# Altium PCB PCB_Business_Card.PcbDoc
Units mm, origin at the board's own origin, x right, y up, seen from the top; angles counter-clockwise.
Board outline 85.72 x 53.91 mm, 2 copper layers (Top Layer, Bottom Layer), stack 1.671 mm thick; 39 components, 49 nets, 185 pads, 16 vias.
Unrouted connection lines stored in the file: 1.
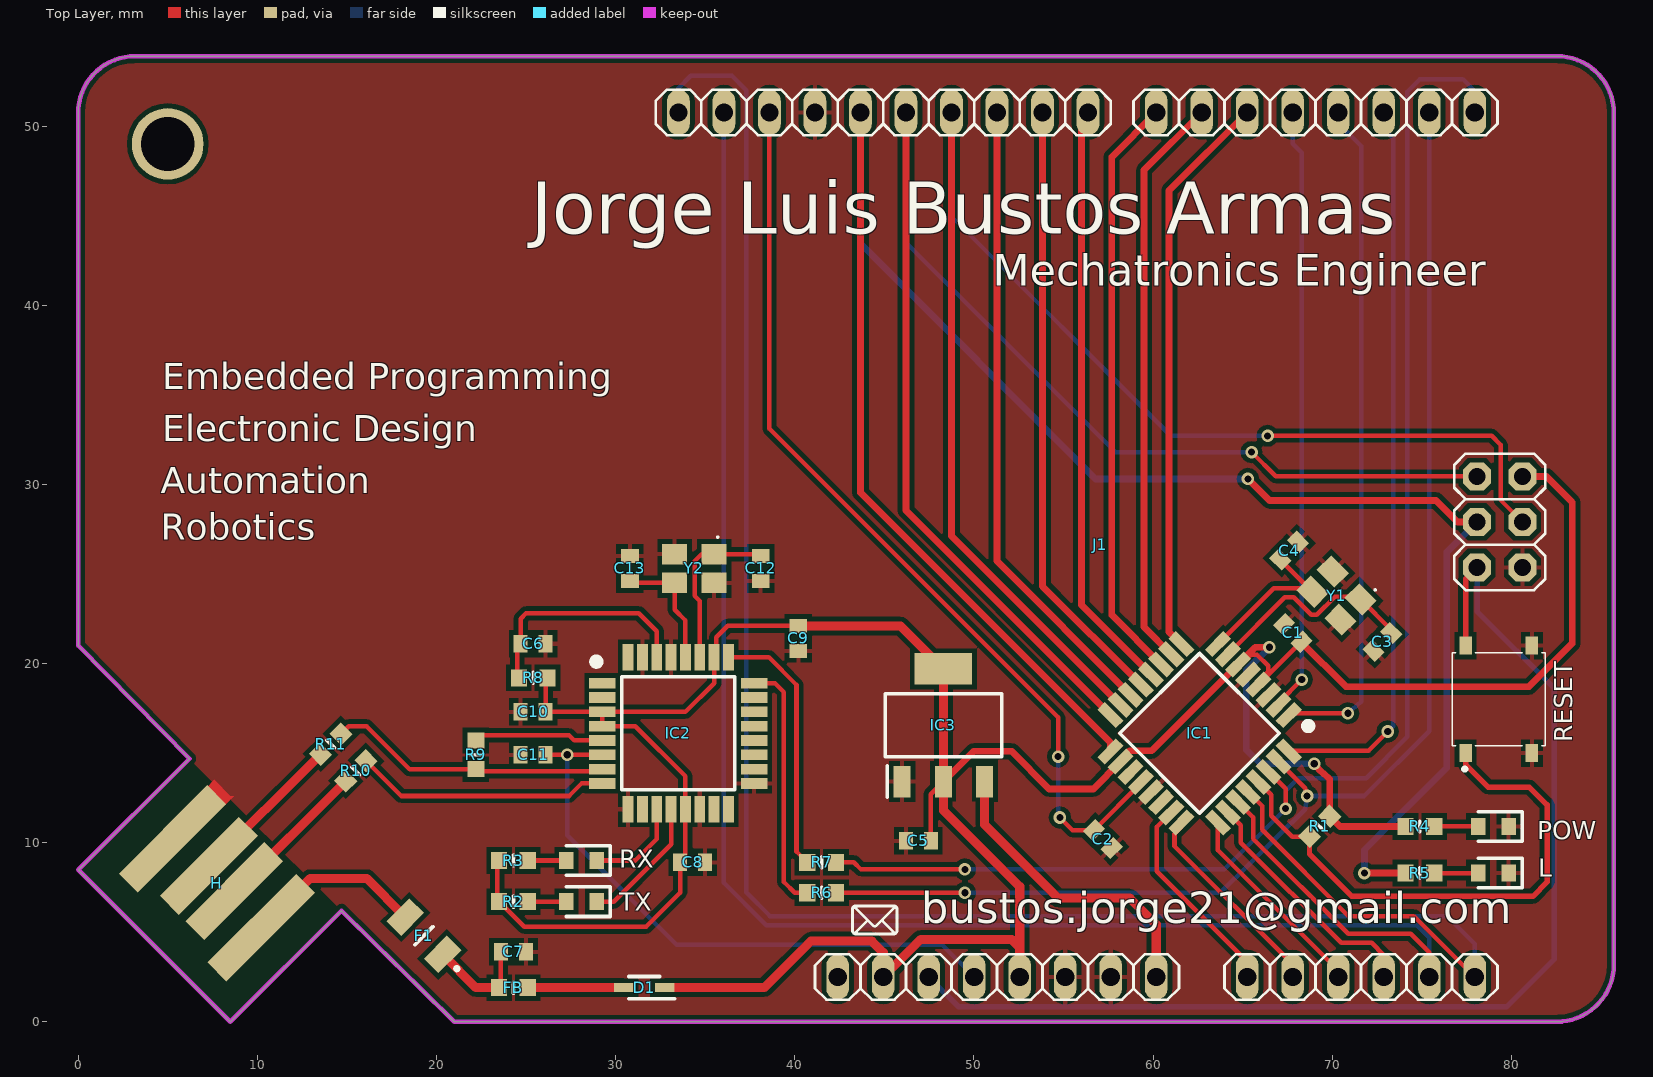
[diagram p0: Top Layer view]
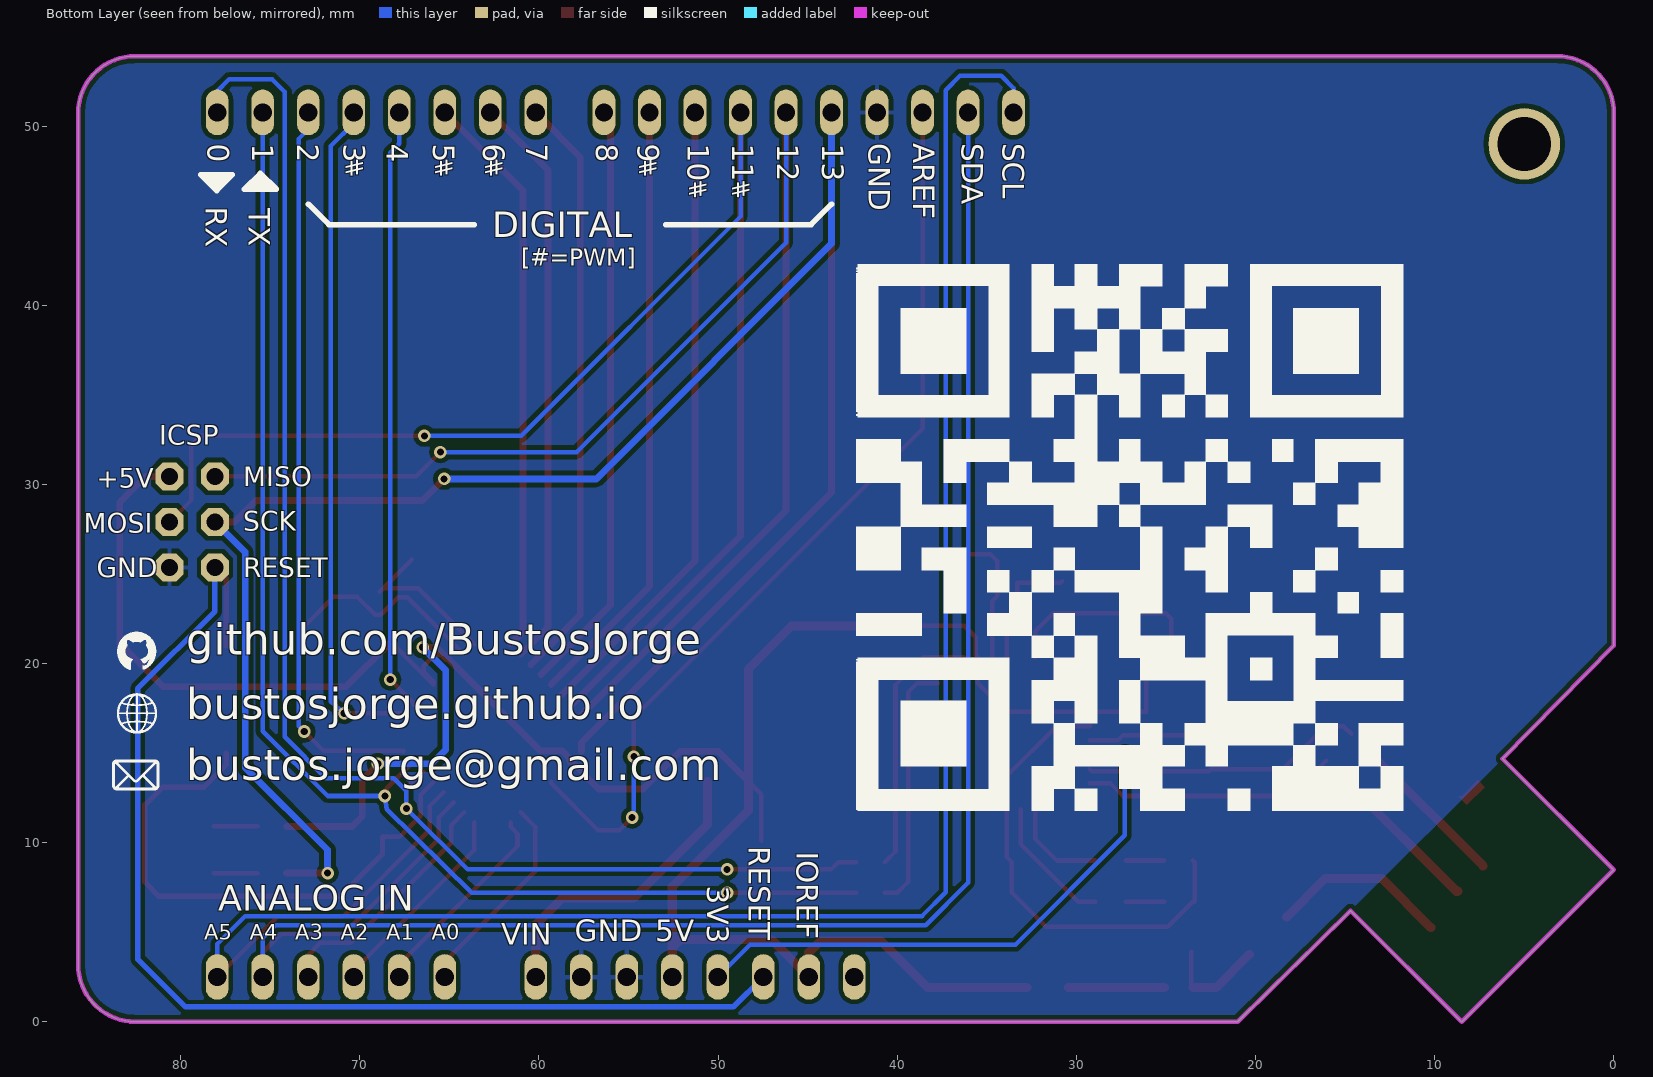
[diagram p1: Bottom Layer view, seen from below]
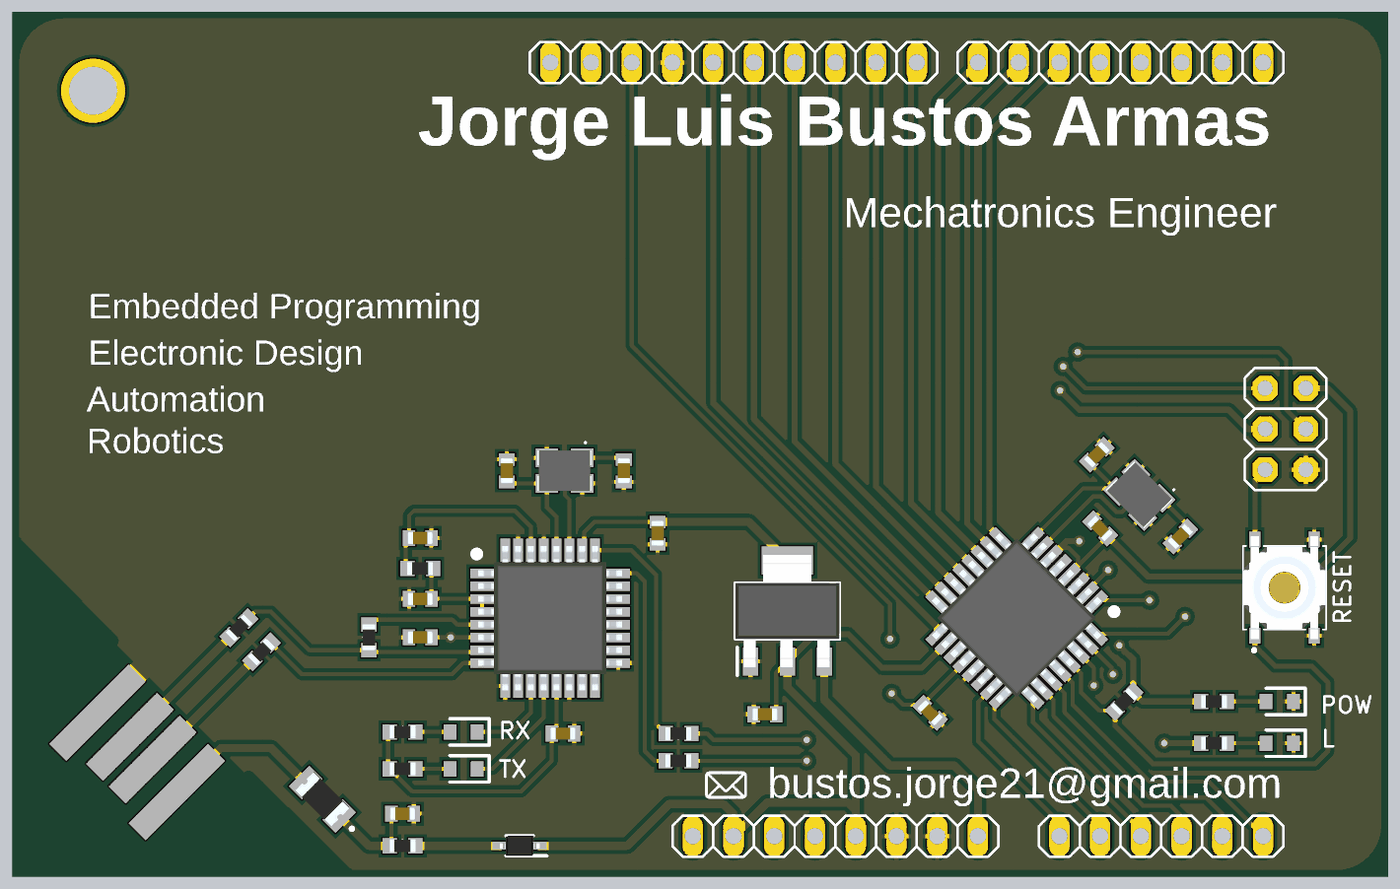
[diagram p2: 3D render of the assembled board from above, using the file's embedded part models]

## Layer stack, top to bottom
Top Solder: solder mask 0.0102, Solder Resist, Dk 3.5
Top Layer: signal copper 0.0356
Dielectric 1: dielectric 1.6, FR-4, Dk 4.8
Bottom Layer: signal copper 0.0356
Bottom Solder: solder mask 0.0102, Solder Resist, Dk 3.5

## Board outline
6.215,14.685 0,21 0,50.72 cw(c3.18,50.72) 3.18,53.9 82.545,53.9 cw(c82.545,50.72) 85.725,50.72 85.725,3.18 85.72,3.18 cw(c82.54,3.18) 82.54,0 21,0 14.7,6.2 8.493,-0.008 8.485,0 0,8.485 0.008,8.478

## Design rules (kind name [scope] priority, off if disabled: settings)
Clearance [All] p1: gap=0.254 except(0.2: SMDPad-SMDPad)
ComponentClearance [All] p1 off: gap=0.254 collisioncheckmode=3 verticalgap=0.254 showdistances=FALSE
PolygonConnect [All] p1: connectstyle=Relief reliefconductorwidth=0.254 reliefentries=4 polygonreliefangle="90 Angle" airgapwidth=0.254
RoutingVias [All] p1: holewidth=0.711 width=1.27 viastyle="Through Hole" minholewidth=0.711 minwidth=1.27 maxholewidth=0.711 maxwidth=1.27
SolderMaskExpansion [All] p1: expansion=0.102
Width [All] p1: maxlimit=0.508 minlimit=0.254 preferedwidth=0.381
29 further rules are at their usual default settings.

## Components (designator, comment, footprint, x,y, rotation, side; value= is the part's Value field where it differs from the comment)
C1 "1uF" CAPC1608X90N 67.8,21.7 r135 top
C2 "100nF" CAPC1608X90N 57.2,10.2 r315 top
C3 "22pF" CAPC1608X90N 72.8,21.2 r225 top
C4 "22pF" CAPC1608X90N 67.6,26.3 r225 top
C5 "1uF" CAPC1608X90N 46.9,10.1 r0 top
C6 "0.1uF" CAPC1608X90N 25.4,21.1 r180 top
C7 "10nF" CAPC1608X90N 24.3,3.9 r0 top
C8 "0.1uF" CAPC1608X90N 34.3,8.9 r180 top
C9 "0.1uF" CAPC1608X90N 40.2,21.4 r90 top
C10 "10uF" CAPC1608X90N 25.4,17.3 r0 top
C11 "33nF" CAPC1608X90N 25.4,14.9 r0 top
C12 "22pF" CAPC1608X90N 38.1,25.3 r270 top
C13 "22pF" CAPC1608X90N 30.8,25.3 r270 top
D1 "1PS76SB10,115" SOD2512X110N 31.6,1.9 r180 top
F1 "1206L200" 1206L05015YR 19.3,4.8 r135 top
FB "Ferrite Beat" RESC1608X55N 24.3,1.9 r180 top
H "USB" USB_FLAT 4.277,4.263 r45 top locked
IC1 "ATMEGA328PB-AN" QFP80P900X900X120-32N 62.6,16.1 r225 top
IC2 "FT232BL" QFP80P900X900X160-32N 33.5,16.1 r0 top
IC3 "LM1117MPX-5.0" SOT230P700X180-4N 48.3,16.55 r90 top
J1 "HEADER" "CONECTOR ARDUINO UNO" 77.96,50.76 r0 top locked
L "SM0603GCL" LEDC1608X60N 79,8.3 r180 top
POW "SM0603GCL" LEDC1608X60N 79,10.9 r180 top
R1 "10K" RESC1608X55N 69.3,10.9 r45 top
R2 "10K" RESC1608X55N 24.3,6.7 r180 top
R3 "10K" RESC1608X55N 24.3,9 r180 top
R4 "10K" RESC1608X55N 74.9,10.9 r180 top
R5 "10K" RESC1608X55N 74.9,8.3 r180 top
R6 "1K" RESC1608X55N 41.5,7.2 r180 top
R7 "1K" RESC1608X55N 41.5,8.9 r180 top
R8 "470R" RESC1608X55N 25.4,19.2 r0 top
R9 "1K5" RESC1608X55N 22.2,14.9 r90 top
R10 "27R" RESC1608X55N 15.5,14 r225 top
R11 "27R" RESC1608X55N 14.1,15.5 r225 top
RESET "PTS526_SK15_SMTR2_LFS" PTS526SK15SMTR2LFS 79.3,18 r90 top
RX "SM0603GCL" LEDC1608X60N 28.1,9 r180 top
TX "SM0603GCL" LEDC1608X60N 28.1,6.7 r180 top
Y1 "TSX-3225_16.0000MF18X-AC0" TSX3225160000MF18XAC0 70.244,23.788 r135 top
Y2 "TSX-3225_16.0000MF18X-AC0" TSX3225160000MF18XAC0 34.4,25.3 r180 top

## Footprints (in the part's own frame and the unit in brackets; to place one, negate y for a bottom-side part, rotate by r counter-clockwise, add the part's x,y. Pads: shape width x height; smd on the part's side, far side on the other; paste and mask are expansions set on the pad)
1206L05015YR [mm]
  rect 1.16x1.82 smd: 1(-1.475,0) 2(1.475,0)
  silkscreen extent -2.7,-0.73 0,0.73, body extent -1.6,-0.83 1.6,0.83, height 1.6
CAPC1608X90N [mm]
  rect 0.78x0.99 smd: 1(-0.7,0) 2(0.7,0)
  body extent -0.8,-0.41 0.8,0.41, height 0.9
"CONECTOR ARDUINO UNO" [mil]
  oval 50x100 hole 40: 1(-300,0) 2(-400,0) 3(-900,-1900) 4(-1300,-1900) 4(-1000,-1900) 5(-800,-1900) 6(-1100,-1900) 9(-500,0) 10(-600,0) 11(-700,0) 12(-850,0) 13(-950,0) 14(-1050,0) 15(-1150,0) 16(-1250,0) 17(-1350,0) 20(-1550,0) 21(-1450,0) 23(-500,-1900) 24(-400,-1900) 25(-300,-1900) 26(-200,-1900) 27(-1650,0) 27(-100,-1900) 28(-1750,0) 28(0,-1900) 29(-1200,-1900) 30(0,0) 31(-100,0) 32(-200,0) 33(-700,-1900) ""(-1400,-1900)
  oct 61.02x61.02 hole 37.4: 4(105,-800) 5(105,-1000) 15(105,-900) 16(5,-800) 17(5,-900) 29(5,-1000)
  silkscreen extent -1800,-1950 155,50
LEDC1608X60N [mm]
  rect 0.8x0.95 smd: 1(-0.85,0) 2(0.85,0)
  silkscreen extent -1.6,-0.82 0.85,0.82
PTS526SK15SMTR2LFS [mm]
  rect 1x0.7 smd: 1(-3,1.85) 2(3,1.85) 3(-3,-1.85) 4(3,-1.85)
  silkscreen extent -4,-2.6 2.6,2.6, body extent -3.2,-2.6 3.2,2.6, height 1.55
QFP80P900X900X120-32N [mm]
  rect 1.475x0.6 smd: 1(-4.238,2.8) 2(-4.238,2) 3(-4.238,1.2) 4(-4.238,0.4) 5(-4.238,-0.4) 6(-4.238,-1.2) 7(-4.238,-2) 8(-4.238,-2.8) 17(4.238,-2.8) 18(4.238,-2) 19(4.238,-1.2) 20(4.238,-0.4) 21(4.238,0.4) 22(4.238,1.2) 23(4.238,2) 24(4.238,2.8)
  rect 0.6x1.475 smd: 9(-2.8,-4.238) 10(-2,-4.238) 11(-1.2,-4.238) 12(-0.4,-4.238) 13(0.4,-4.238) 14(1.2,-4.238) 15(2,-4.238) 16(2.8,-4.238) 25(2.8,4.238) 26(2,4.238) 27(1.2,4.238) 28(0.4,4.238) 29(-0.4,4.238) 30(-1.2,4.238) 31(-2,4.238) 32(-2.8,4.238)
  silkscreen extent -4.77,-3.15 3.15,4.2, body extent -4.5,-4.5 4.5,4.5, height 1.2
QFP80P900X900X160-32N [mm]
  rect 1.475x0.6 smd: 1(-4.238,2.8) 2(-4.238,2) 3(-4.238,1.2) 4(-4.238,0.4) 5(-4.238,-0.4) 6(-4.238,-1.2) 7(-4.238,-2) 8(-4.238,-2.8) 17(4.238,-2.8) 18(4.238,-2) 19(4.238,-1.2) 20(4.238,-0.4) 21(4.238,0.4) 22(4.238,1.2) 23(4.238,2) 24(4.238,2.8)
  rect 0.6x1.475 smd: 9(-2.8,-4.238) 10(-2,-4.238) 11(-1.2,-4.238) 12(-0.4,-4.238) 13(0.4,-4.238) 14(1.2,-4.238) 15(2,-4.238) 16(2.8,-4.238) 25(2.8,4.238) 26(2,4.238) 27(1.2,4.238) 28(0.4,4.238) 29(-0.4,4.238) 30(-1.2,4.238) 31(-2,4.238) 32(-2.8,4.238)
  silkscreen extent -4.77,-3.15 3.15,4.2, body extent -4.5,-4.5 4.5,4.5, height 1.6
RESC1608X55N [mm]
  rect 0.9x0.95 smd: 1(-0.8,0) 2(0.8,0)
  silkscreen extent 0,-0.3 0,0.3, body extent -0.8,-0.4 0.8,0.4, height 0.55
SOD2512X110N [mm]
  rect 1.1x0.5 smd: 1(-1.15,0) 2(1.15,0)
  silkscreen extent -1.7,-0.63 0.85,0.63, body extent -1.24,-0.62 1.24,0.63, height 0.93
SOT230P700X180-4N [mm]
  rect 1.75x0.95 smd: 1(-3.15,2.3) 2(-3.15,0) 3(-3.15,-2.3)
  rect 1.75x3.2 smd: 4(3.15,0)
  silkscreen extent -4.03,-3.25 1.75,3.25, body extent -3.5,-3.25 3.5,3.25, height 1.68
TSX3225160000MF18XAC0 [mm]
  rect 1.4x1.15 smd: 1(-1.1,-0.8) 2(1.1,-0.8) 3(1.1,0.8) 4(-1.1,0.8)
  silkscreen extent -1.35,-1.8 -1.25,-1.7, body extent -1.68,-1.26 1.68,1.26, height 0.7
USB_FLAT [mm]
  rect 7x1.5 smd: 1(4.9,-3.5) 4(4.9,3.5)
  rect 6.25x1.5 smd: 2(5.275,-1) 3(5.275,1)

## Part data
C1 C2 C3 C4 C5 C6 C7 C8 C9 C10 C11 C12 C13: library part 06035C105KAT2A, "Capacitor"
D1: "Schottky Diode"
F1: "Resettable Fuse"
FB R1 R2 R3 R4 R5 R6 R7 R8 R9 R10 R11: library part KTR03EZPF1501, "Resistor"
IC1 IC2 IC3: "Integrated Circuit"
J1: library part "HEDER ARDUINO UNO"
L POW RX TX: "LED"
RESET: "Switch"
Y1 Y2: "Crystal or Oscillator"

## Free pads (board coordinates)
  round 4 hole 3: 0(5,49)

## Via types
v1: diameter 0.7, hole 0.4, Top Layer to Bottom Layer, tented both sides, 16 vias

## Nets (pads, with @x,y where several pads share a name; then routed paths per layer and width w, separated by ;. In a path a pad name is that pad's centre, name@x,y a point inside that pad or via, vN(x,y) a via of type N, cw(c..) or ccw(c..) an arc to the next point about the centre after c; other vN are vias at no path point)
+3V3: C11.2 IC2.6 J1.6 | length 32.9
  Top Layer w0.254: C11.2 v1(27.3,14.9) 28.681,14.9 IC2.6@28.8,14.781
  Bottom Layer w0.254: v1@27.3,14.6 27.3,10.4 33.4,4.3 48.22,4.3 J1.6
+5V: C1.1 C5.2 C8.2 C9.2 C10.2 D1.1 IC1.4 IC1.6 IC1.18 IC2.3 IC2.4 IC2.13 IC2.26 IC3.2 IC3.4 J1.4 R1.2 R2.2 R3.2 R4.2 R8.2 | length 177.9
  Top Layer w0.254: R3.2 23.4,8.9 23.4,6.7 R2.2 24.9,5.3 31.7,5.3 33.6,7.2 C8.2 33.9,9.2 IC2.13 33.9,13.7 31.1,16.5 IC2.4 IC2.3 ; R8.2@26.1,19.2 C10.2 IC2.3 ; C9.2@40,22.1 36.262,22.1 35.619,21.457 35.619,20.457 IC2.26 35.5,18.9 33.9,17.3 IC2.3 ; C5.2 47.6,12.7 IC3.2 ; IC1.6@65.003,20.2 65.171,20.2 65.465,20.494 65.806,20.494 66.429,19.871 66.429,19.531 65.88,18.982 IC1.4 C1.1@68.271,21.205
  Top Layer w0.381: IC3.2 50,15.1 52.1,15.1 54.2,13 56.672,13 IC1.18 58.268,14.517 58.268,14.674 58.723,15.13 59.933,15.13 IC1.6 65.003,20.2 65.703,20.9 v1(66.5,20.9) ; C1.1@68.271,21.205 70.776,18.7 81,18.7 83.4,21.1 83.4,29 81.96,30.44 J1.4@80.627,30.44 ; v1(69,14.4) 69.328,14.023 69.866,13.541 R1.2 70.431,10.9 R4.2
  Top Layer w0.508: D1.1 38.3,1.9 40.9,4.5 44.3,4.5 44.94,3.86 44.94,2.5 47.04,4.6 52.1,4.6 52.56,4.14 ; C9.2@40,22.1 45.9,22.1 IC3.4 IC3.2 48.3,11.8 52.56,7.54 52.56,4.14 ; J1.4@52.56,2.5 52.56,4.14
  Bottom Layer w0.381: v1(66.5,20.9) 65.2,19.6 65.2,15.2 66,14.4 v1(69,14.4)
A0: IC1.23 J1.23 | length 11.6
  Top Layer w0.254: IC1.23 60.2,10.872 60.2,8.4 65.26,3.34 J1.23
A1: IC1.24 J1.24 | length 11.5
  Top Layer w0.254: IC1.24 61.583,10.883 61.2,10.5 61.2,9.8 67.8,3.2 J1.24
A2: IC1.25 J1.25 | length 11.4
  Top Layer w0.254: IC1.25 63.617,9.583 70.2,3 70.2,2.64 J1.25
A3: IC1.26 J1.26 | length 13.8
  Top Layer w0.254: IC1.26 64.9,10.972 64.9,10 70.5,4.4 72.2,4.4 72.88,3.72 J1.26
A4: IC1.27 J1.27 | length 102.1
  Top Layer w0.254: IC1.27 65.584,11.419 65.584,10.216 70.892,4.908 74.392,4.908 75.42,3.88 J1.27@75.42,2.5
  Bottom Layer w0.254: J1.27@36.05,50.76 36.05,7.75 38.408,5.392 74.708,5.392 75.42,4.68 J1.27@75.42,2.5
A5: IC1.28 J1.28 | length 111.9
  Top Layer w0.254: IC1.28 66.092,12.042 66.092,10.708 70.9,5.9 74.56,5.9 J1.28@77.96,2.5
  Bottom Layer w0.254: J1.28@33.51,50.76 33.51,52.11 34.2,52.8 36.5,52.8 37.3,52 37.3,7.218 38.618,5.9 76.4,5.9 77.96,4.34 J1.28@77.96,2.5
A6: IC1.19
A7: IC1.22
AREF: C2.1 IC1.20 J1.20 | length 52
  Top Layer w0.254: J1.20 38.59,33.11 54.7,17 v1(54.7,14.8) ; v1(54.8,11.4) 55.505,10.695 C2.1 59.32,13.31 IC1.20
  Bottom Layer w0.254: v1(54.7,14.8) 54.7,11.5 v1(54.8,11.4)
D0/RX: IC1.30 J1.30 R7.1 | length 79.7
  Top Layer w0.254: R7.1 43.3,8.9 43.7,8.5 v1(49.5,8.5) ; IC1.30 67.4,12.997 v1(67.4,11.9)
  Bottom Layer w0.254: v1(49.5,8.5) 63.982,8.5 v1(67.4,11.9) 67.4,12.9 68.1,13.6 71.9,13.6 74.2,15.9 74.2,51.9 74.9,52.6 77.3,52.6 77.96,51.94 J1.30
D1/TX: IC1.31 J1.31 R6.1 | length 74.3
  Top Layer w0.254: R6.1 v1(49.5,7.2) ; IC1.31 68.5,13.028 v1(68.6,12.6)
  Bottom Layer w0.254: v1(49.5,7.2) 63.744,7.2 68.497,11.859 v1(68.6,12.6) 71.8,12.6 75.42,16.22 J1.31
D2: IC1.32 J1.32 | length 40.9
  Top Layer w0.254: IC1.32 67.577,15.131 72.031,15.131 v1(73.1,16.2)
  Bottom Layer w0.254: J1.32 72.88,49.82 73.4,49.3 73.4,16.5 v1(73.1,16.2)
D3: IC1.1 J1.1 | length 37.8
  Top Layer w0.254: IC1.1@67.577,17.217 v1(70.883,17.217) v1@70.9,17.1
  Bottom Layer w0.254: J1.1 70.34,50.16 71.617,48.883 71.617,17.85 v1(70.883,17.217)
D4: IC1.2 J1.2 | length 33.8
  Top Layer w0.254: IC1.2 67.011,17.811 v1(68.3,19.1)
  Bottom Layer w0.254: J1.2 67.8,49 68.3,48.5 v1(68.3,19.1)
D5: IC1.9 J1.9 | length 31.8
  Top Layer w0.381: IC1.9 60.9,21.76 60.9,46.4 J1.9
D6: IC1.10 J1.10 | length 32.2
  Top Layer w0.381: IC1.10 59.5,22.028 59.5,47.54 J1.10
D7: IC1.11 J1.11 | length 33
  Top Layer w0.381: J1.11 57.7,48.28 57.7,22.697 IC1.11
D8: IC1.12 J1.12 | length 33.1
  Top Layer w0.381: J1.12 56,50.39 56,23.266 IC1.12
D9: IC1.13 J1.13 | length 34.2
  Top Layer w0.381: J1.13 53.83,24.304 IC1.13
D10: IC1.14 J1.14 | length 35.6
  Top Layer w0.381: J1.14 51.29,25.713 IC1.14
D11/MOSI: IC1.15 J1.15 | length 83.5
  Top Layer w0.254: v1(66.4,32.7) 78.9,32.7 79.4,32.2 79.4,29.127 J1.15@80.627,27.9
  Top Layer w0.381: J1.15@48.75,50.76 48.75,27.122 IC1.15
  Bottom Layer w0.254: J1.15@48.75,50.76 48.75,44.95 61,32.7 v1(66.4,32.7)
D12/MISO: IC1.16 J1.16 | length 82.9
  Top Layer w0.254: v1(65.5,31.8) 66.86,30.44 J1.16@78.087,30.44
  Top Layer w0.381: J1.16@46.21,50.76 46.21,28.53 IC1.16
  Bottom Layer w0.254: J1.16@46.21,50.76 46.21,43.49 57.9,31.8 v1(65.5,31.8)
D13/SCK: IC1.17 J1.17 R5.2 | length 114.1
  Top Layer w0.381: J1.17@43.67,50.76 43.67,29.53 57.623,15.577 IC1.17 ; v1(65.3,30.3) 66.5,29.1 75.8,29.1 77,27.9 J1.17@78.087,27.9 ; v1(71.8,8.3) R5.2
  Bottom Layer w0.381: J1.17@43.67,50.76 43.67,43.43 56.8,30.3 v1(65.3,30.3) ; v1(71.8,8.3) 71.8,9.6 76.4,14.2 76.4,26.213 J1.17@78.087,27.9
D+: IC2.7 R9.1 R11.1 | length 15.9
  Top Layer w0.254: R11.1 15.1,16.5 16.1,16.5 18.5,14.1 R9.1 22.5,14.1 22.619,13.981 29.143,13.981 IC2.7
D-: IC2.8 R10.1 | length 14.3
  Top Layer w0.254: R10.1 18.031,12.6 27.4,12.6 28.1,13.3 IC2.8
GND: C1.2 C2.2 C3.2 C4.1 C5.1 C6.1 C7.2 C8.1 C9.1 C10.1 C11.1 C12.2 C13.1 H.4 IC1.3 IC1.5 IC1.21 IC2.9 IC2.14 IC2.17 IC2.29 IC2.31 IC3.1 J1.3 J1.5 J1.21 L.1 POW.1 RESET.3 RESET.4 Y1.2 Y1.4 Y2.2 Y2.4
NetC6_2: C6.2 IC2.30 R8.1 | length 13
  Top Layer w0.254: R8.1@24.5,19.2 24.5,20.9 C6.2 24.7,22.5 25,22.8 31.3,22.8 32.3,21.8 IC2.30
NetC7_1: C7.1 F1.1 FB.2 | length 6
  Top Layer w0.254: FB.2 23.6,2 C7.1
  Top Layer w0.508: F1.1 22.2,1.9 FB.2
NetF1_2: F1.2 H.1 | length 10.1
  Top Layer w0.508: H.1 12.964,8 16.1,8 F1.2
NetH_2: H.2 R10.2 | length 8.8
  Top Layer w0.508: H.2 8.786,7.286 R10.2
NetH_3: H.3 R11.2 | length 8.8
  Top Layer w0.508: H.3 R11.2
NetIC2_5: IC2.5 R9.2 | length 7.3
  Top Layer w0.254: R9.2 22.5,16 27.4,16 27.7,15.7 IC2.5
NetL_2: L.2 R5.1 | length 2.4
  Top Layer w0.254: R5.1 L.2
NetPOW_2: POW.2 R4.1 | length 2.4
  Top Layer w0.254: R4.1 POW.2
NetR2_1: R2.1 TX.2 | length 2.2
  Top Layer w0.254: R2.1 TX.2
NetR3_1: R3.1 RX.2 | length 2.2
  Top Layer w0.254: R3.1 RX.2
RESET: IC1.29 J1.29 R1.1 RESET.1 RESET.2 | length 95.8
  Top Layer w0.254: IC1.29 66.6,12.666 66.6,11.5 67.766,10.334 R1.1
  Top Layer w0.305: R1.1 68.734,9.366 71.1,7 81.2,7 82,7.8 82,12.1 81,13.1 78.7,13.1 77.45,14.35 RESET.1 ; RESET.2 77.45,24.723 J1.29@78.087,25.36
  Bottom Layer w0.305: J1.29@47.48,2.5 49.156,0.824 79.724,0.824 82.4,3.5 82.4,18.6 78.087,22.913 J1.29@78.087,25.36
RX: IC2.25 R7.2 | length 14.6
  Top Layer w0.254: IC2.25 38.562,20.338 40.1,18.8 40.1,9.5 R7.2
RXLED: IC2.11 RX.1 | length 5.5
  Top Layer w0.254: RX.1 31.1,9 32.3,10.2 IC2.11
TX: IC2.24 R6.2 | length 14
  Top Layer w0.254: IC2.24 38.9,18.9 39.4,18.4 39.4,7.8 40,7.2 R6.2
TXLED: IC2.12 TX.1 | length 7.4
  Top Layer w0.254: TX.1 29.9,6.7 33.1,9.9 IC2.12
VIN: IC3.3 J1.33 | length 17.2
  Top Layer w0.508: IC3.3 50.6,11 54.7,6.9 58.7,6.9 60.18,5.42 J1.33
VUSB: D1.2 FB.1 | length 5.3
  Top Layer w0.508: FB.1 D1.2
XTAL1: C3.1 IC1.7 Y1.1 | length 12.3
  Top Layer w0.254: IC1.7 67.364,23.692 67.856,23.692 68.831,22.717 69.146,22.717 70.156,23.727 71.587,23.727 Y1.1 73.295,21.868 C3.1
XTAL2: C4.2 IC1.8 Y1.3 | length 8.9
  Top Layer w0.254: IC1.8 66.74,24.2 Y1.3@68.7,24.2 ; C4.2 67.105,25.795 Y1.3@68.7,24.2 ; Y1.3 Y1.3@68.7,24.2
XTIN: C12.1 IC2.27 Y2.1 | length 9.4
  Top Layer w0.254: IC2.27 34.7,23.486 34.419,23.767 34.419,25.719 34.8,26.1 Y2.1 38,26.1 C12.1
XTOUT: C13.2 IC2.28 Y2.3 | length 7
  Top Layer w0.254: C13.2 30.9,24.5 Y2.3 33.3,23 33.9,22.4 IC2.28
pads on no net: IC2.1 IC2.2 IC2.10 IC2.15 IC2.16 IC2.18 IC2.19 IC2.20 IC2.21 IC2.22 IC2.23 IC2.32 J1.

## Polygon pours and split planes (outlines as drawn)
GND on Top Layer "Top Layer-GND" (solid, pour order 2): 6.2,14.685 0,21 0,50.72 cw(c3.18,50.72) 3.18,53.9 82.545,53.9 cw(c82.545,50.72) 85.725,50.72 85.725,3.18 cw(c82.542,3.183) 82.54,0 21,0 14.7,6.2 8.493,-0.008 0,8.485
GND on Bottom Layer "Bottom-GND" (solid, pour order 3): 6.215,14.685 0,21 0,50.72 cw(c3.18,50.72) 3.18,53.9 82.545,53.9 cw(c82.545,50.72) 85.725,50.72 85.725,3.18 85.72,3.18 cw(c82.54,3.18) 82.54,0 21,0 14.7,6.2 8.493,-0.008 8.485,0 0,8.485 0.008,8.478

## Keep-outs
Keep-Out Layer:
  lines w0.254: 0,8.485 8.485,0 ; 0.008,8.478 6.215,14.685 0,21 0,50.72 cw(c3.18,50.72) 3.18,53.9 82.545,53.9 cw(c82.545,50.72) 85.725,50.72 85.725,3.18 ; 8.493,-0.008 14.7,6.2 21,0 82.54,0 ccw(c82.54,3.18) 85.72,3.18

## Other copper
Top Layer:
  region net GND: 7.2,13.1 8.2,12.1 8.7,12.6 8.5,12.6 7.6,13.5
Multi-Layer:
  pour cut-out: 6.215,14.685 0.008,8.478 0.008,8.477 8.485,0 14.685,6.2 14.7,6.2

## Silkscreen, mask and mechanical layers (free items; w line width, h text height)
Top Overlay:
  region: 559 vertices and 4 holes, not listed, extent 43.162,4.831 45.774,6.543
  text "Jorge Luis Bustos Armas" at 25.3,43 h5
  text "Mechatronics Engineer" at 51.046,40.5 h3
  text "Embedded Programming" at 4.7,34.8 h2.5
  text "Electronic Design" at 4.7,31.9 h2.5
  text "Automation" at 4.6,29 h2.5
  text "Robotics" at 4.6,26.4 h2.5
  text "bustos.jorge21@gmail.com" at 47.057,4.9 h3
Bottom Overlay:
  drawing of 51 lines, arcs and shapes, not listed
  text "SCL" at 34.1,49.024 h1.21 r90
  text "SDA" at 36.4,49.024 h1.21 r90
  text "AREF" at 39.1,49.024 h1.21 r90
  text "GND" at 41.6,49.024 h1.21 r90
  text "13" at 44.2,49 h1.21 r90
  text "12" at 46.7,49 h1.21 r90
  text "11" at 49.2,49 h1.21 r90
  text "10" at 51.7,49 h1.21 r90
  text "9" at 54.5,49 h1.21 r90
  text "8" at 56.8,49 h1.21 r90
  text "7" at 60.7,49 h1.21 r90
  text "6" at 63.1,49 h1.21 r90
  text "5" at 65.9,49 h1.21 r90
  text "4" at 68.5,49 h1.21 r90
  text "3" at 70.9,49 h1.21 r90
  text "2" at 73.5,49 h1.21 r90
  text "1" at 76,49 h1.21 r90
  text "0" at 78.5,49 h1.21 r90
  text "#" at 54.4,47.1 h0.95 r90
  text "#" at 63,47.1 h0.95 r90
  text "#" at 65.8,47.1 h0.95 r90
  text "#" at 70.8,47.1 h0.95 r90
  text "#" at 49.2,45.9 h0.95 r90
  text "#" at 51.6,45.9 h0.95 r90
  text "RX" at 78.6,45.5 h1.21 r90
  text "TX" at 76.2,45.4 h1.21 r90
  text "DIGITAL" at 62.6,43.8 h1.42
  text "[#=PWM]" at 61,42.2 h0.95
  text "ICSP" at 81.2,32.2 h1.08
  text "MISO" at 76.5,29.9 h1.08
  text "+5V" at 84.681,29.8 h1.08
  text "SCK" at 76.5,27.4 h1.08
  text "MOSI" at 85.4,27.3 h1.08
  text "RESET" at 76.5,24.8 h1.08
  text "GND" at 84.681,24.8 h1.08
  text "github.com/BustosJorge" at 79.7,19.9 h3
  text "bustosjorge.github.io" at 79.7,16.3 h3
  text "bustos.jorge@gmail.com" at 79.7,12.9 h3
  text "RESET" at 48.3,9.8 h1.21 r90
  text "IOREF" at 45.6,9.5 h1.21 r90
  text "3V3" at 50.6,7.6 h1.21 r90
  text "ANALOG IN" at 77.9,6.2 h1.42
  text "A0" at 65.989,4.59 h0.86
  text "A1" at 68.529,4.59 h0.86
  text "A2" at 71.069,4.59 h0.86
  text "A3" at 73.609,4.59 h0.86
  text "A4" at 76.149,4.59 h0.86
  text "A5" at 78.689,4.59 h0.86
  text "5V" at 53.5,4.5 h1.21
  text "GND" at 58,4.5 h1.21
  text "VIN" at 62.1,4.3 h1.21